# Altium PCB projet_pcb_etu_PIC18.PCBDOC
Units mm, origin at the board's own origin, x right, y up, seen from the top; angles counter-clockwise.
Board outline 141.22 x 100.51 mm, 2 copper layers (TopLayer, BottomLayer); 27 components, 44 nets, 123 pads, 0 vias.
Unrouted connection lines stored in the file: 59.
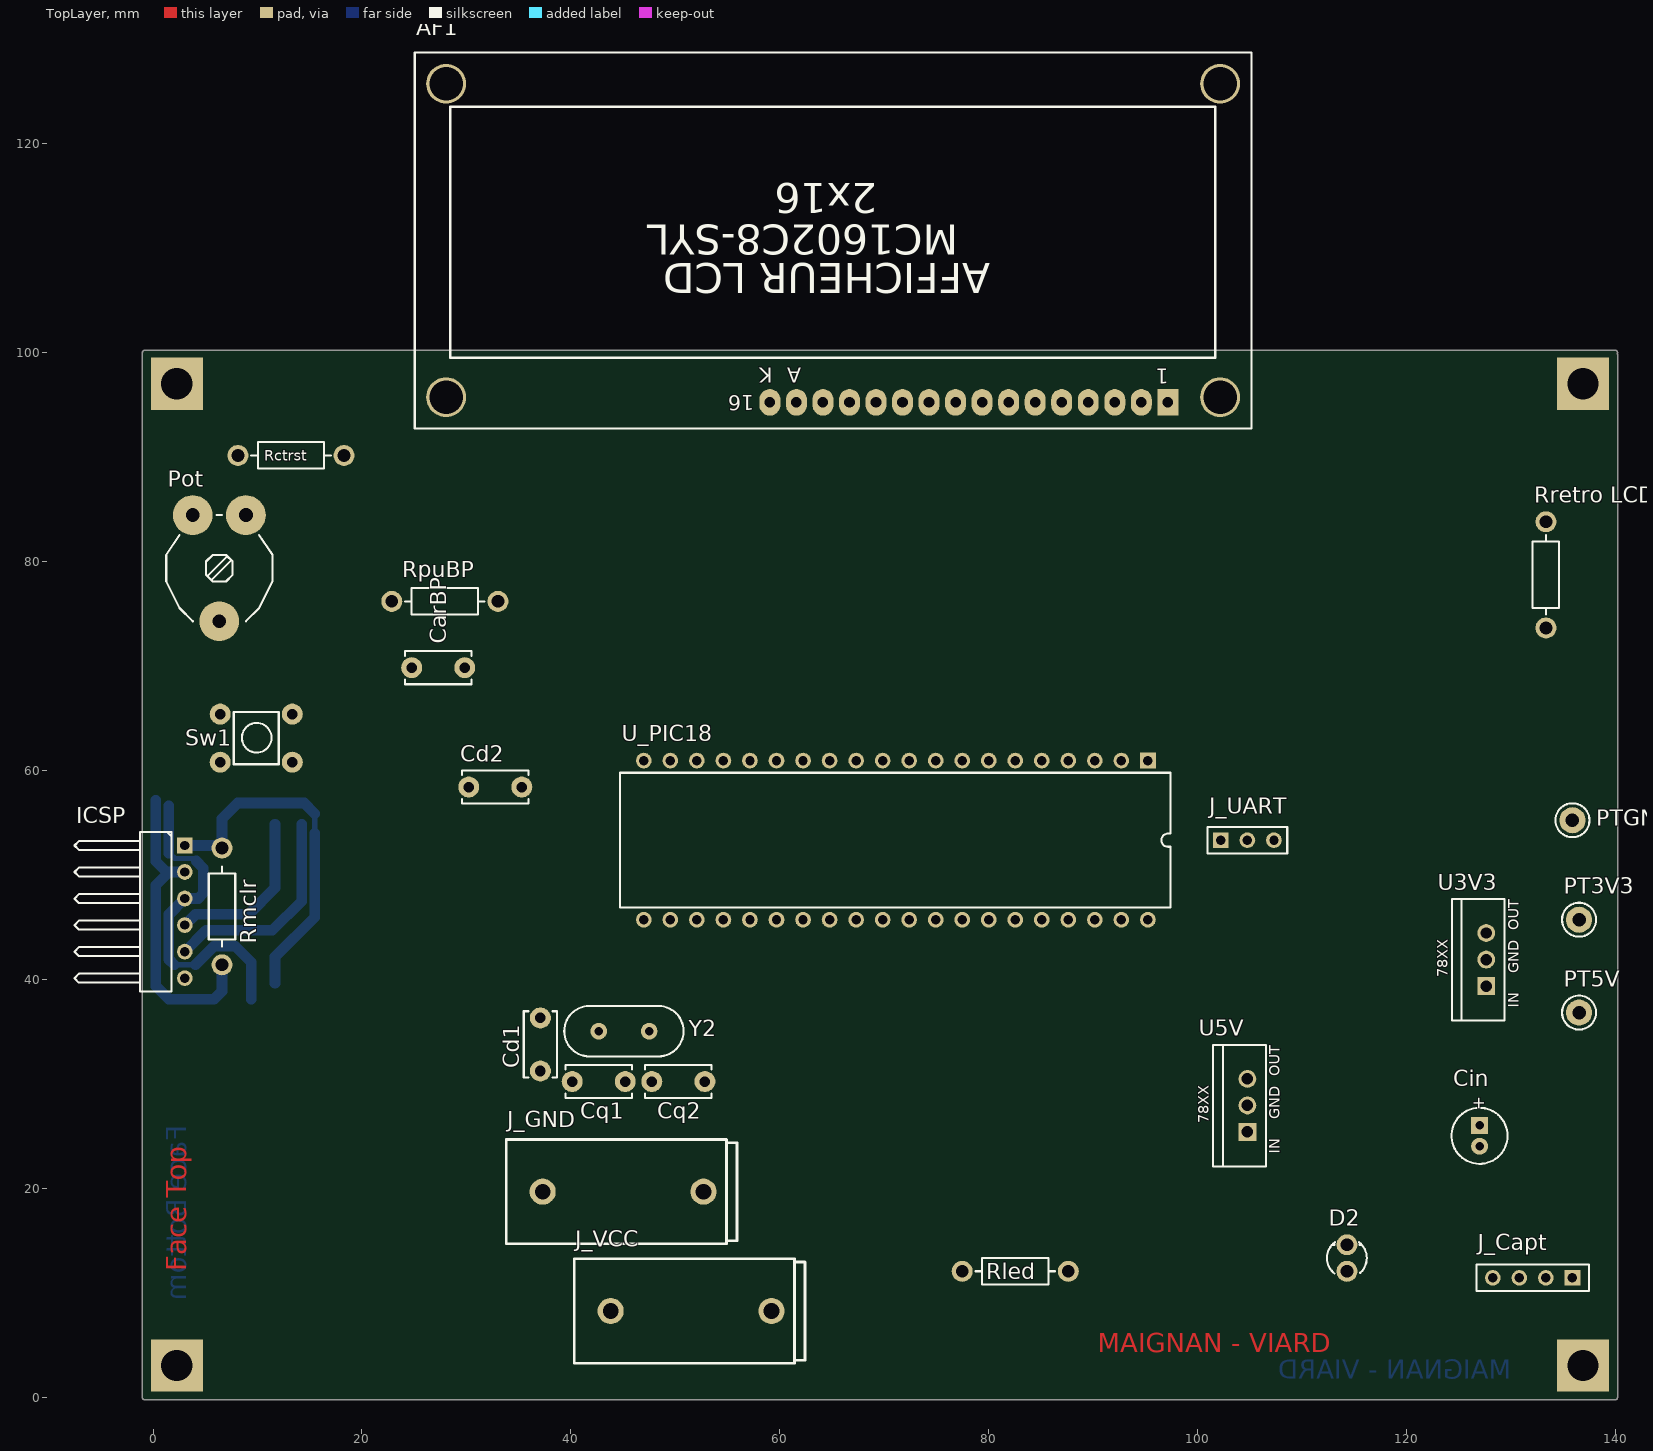
[diagram p0: TopLayer view]
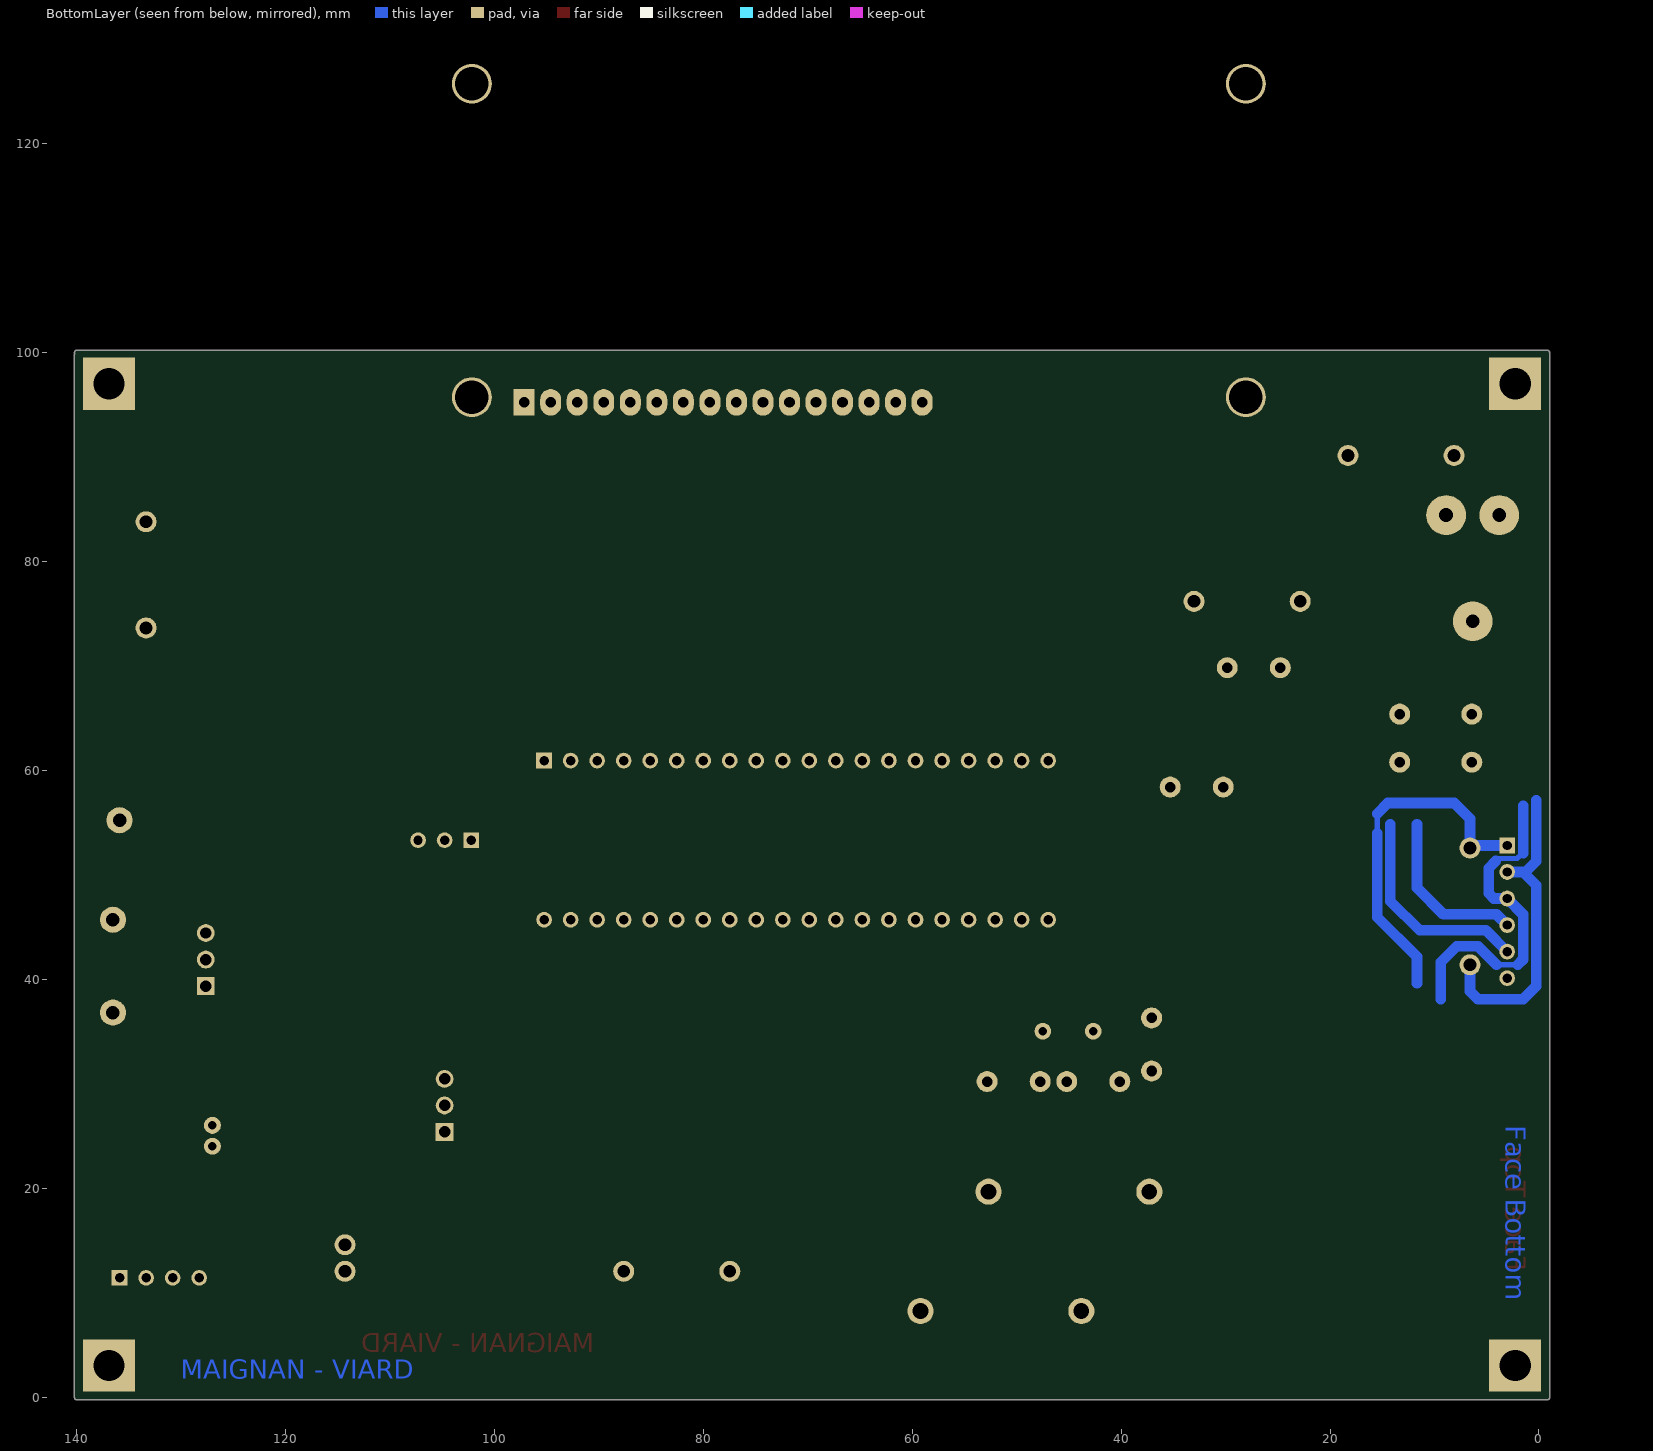
[diagram p1: BottomLayer view, seen from below]

## Layer stack, top to bottom
TopSolder: solder mask 0.0102, Solder Resist, Dk 3.5
TopLayer: signal copper 0.0356
Dielectric1: core 0.32, FR-4, Dk 4.8
BottomLayer: signal copper 0.0356
BottomSolder: solder mask 0.0102, Solder Resist, Dk 3.5

## Board outline
-0.762,-0.254 cw(c-0.762,0) -1.016,0 -1.016,100 cw(c-0.762,100) -0.762,100.254 139.954,100.254 cw(c139.954,100) 140.208,100 cw(c139.954,100) 140.192,99.911 cw(c139.954,99.822) 140.208,99.822 140.208,0 cw(c139.954,0) 139.954,-0.254

## Design rules (kind name [scope] priority, off if disabled: settings)
Clearance [All] p1: gap=0.25 ignorepadtopadclearanceinfootprint=FALSE except(0: Arc-Hole Track-Hole SMDPad-Hole THPad-Hole Via-Hole Fill-Hole Poly-Hole Region-Hole Text-Hole)
FabricationTestPointUsage TestPointUsage [All] p1: valid=0 allowmultiple=FALSE
FabricationTestpoint Testpoint [All] p1: side=3 testpointundercomponent=TRUE minsize=1.016 maxsize=2.54 preferedsize=1.524 minholesize=0.508 maxholesize=1.016 preferedholesize=0.813 testpointgrid=0.025 allowsidetop=TRUE allowsidebottom=TRUE usegrid=TRUE gridtolerance=0
PlaneConnect [All] p1: planeconnectstyle=Relief reliefexpansion=0.5 reliefentries=4 reliefconductorwidth=1.016 reliefairgap=0.5
PolygonConnect [All] p1: connectstyle=Relief reliefconductorwidth=1.016 reliefentries=4 polygonreliefangle="90 Angle" airgapwidth=0.254
RoomDefinition projet_pcb_etu_PIC18 [InComponentClass('projet_pcb_etu_PIC18')] p1: confinementstyle=ConfineIn formatcopy=TRUE lockcomponents=FALSE outline 141.605,1.905 179.705,1.905 179.705,16.51 141.605,16.51
RoutingVias [All] p1: holewidth=0.6 width=1.524 viastyle="Through Hole" minholewidth=0.6 minwidth=1.524 maxholewidth=0.6 maxwidth=1.524
ShortCircuit [All] p1: allowed=TRUE
SilkToSolderMaskClearance SilkscreenOverComponentPads [IsPad] p1: minsilkscreentomaskgap=0.254 clearancetoexposedcopper=TRUE
SolderMaskExpansion [All] p1: expansion=0.051 istentingtop=FALSE
Width Width_Power [(InNet('GND') OR InNet('+5V')  OR InNet('+3V3') OR InNet('VCC'))] p1: maxlimit=7.62 minlimit=0.406 preferedwidth=1.27
Width [All] p2: maxlimit=7.62 minlimit=0.279 preferedwidth=1.016
25 further rules are at their usual default settings.

## Components (designator, comment, footprint, x,y, rotation, side; value= is the part's Value field where it differs from the comment)
AF1 "AFFICHEUR_LCD_2X16_" AFFICHEUR_LCD_MC1602C8-SYL 97.155,95.25 r180 top
CarBP "CONDENSATEUR_CER_RAD_5.08" CONDENSATEUR_CERAMIQUE_RADIAL_5.08 29.845,69.85 r180 top value=100nF
Cd1 "CONDENSATEUR_CER_RAD_5.08" CONDENSATEUR_CERAMIQUE_RADIAL_5.08 37.084,31.242 r90 top value=10nF
Cd2 "CONDENSATEUR_CER_RAD_5.08" CONDENSATEUR_CERAMIQUE_RADIAL_5.08 35.306,58.42 r180 top value=10nF
Cin "CONDENSATEUR_POL_ELECTROLY_RAD_2.0/5.08" CONDENSATEUR_POLARISE_ELECTROLYTIQUE_RADIAL_2.0/5.08 127,25.035 r270 top value=10µF/>25V
Cq1 "CONDENSATEUR_CER_RAD_5.08" CONDENSATEUR_CERAMIQUE_RADIAL_5.08 45.212,30.226 r180 top value=22pF
Cq2 "CONDENSATEUR_CER_RAD_5.08" CONDENSATEUR_CERAMIQUE_RADIAL_5.08 47.752,30.226 r0 top value=22pF
D2 "LED_3MM" LED_3MM 114.3,14.605 r180 top
ICSP "BARRETTE_6 CONTACTS_1 RANGEE_MALE_COUDEE" BARRETTE_6_M_C 3.048,52.832 r270 top
J_Capt "BARRETTE_4 CONTACTS_1 RANGEE_FEMELLE_DROITE" BARRETTE_4_F_D 135.89,11.43 r180 top
J_GND "DOUILLE BANANE 4mm" DOUILLE_BANANE_4MM_COUDEE 52.705,19.685 r270 top
J_UART "BARRETTE 3 CONTACTS 1 RANGEE MALE DROITE" BARRETTE_3_M_D 102.235,53.34 r0 top
J_VCC "DOUILLE BANANE 4mm" DOUILLE_BANANE_4MM_COUDEE 59.215,8.255 r270 top
Pot "RESISTANCE_VARIABLE_TRAVERSANTE : PT10LV" TRIMMER_MONOTOUR_PT10LV 8.89,84.455 r180 top value=1K
PT3V3 "POINT_TEST" POINT_TEST 136.525,45.72 r0 top
PT5V "POINT_TEST" POINT_TEST 136.525,36.83 r270 top
PTGND "POINT_TEST" POINT_TEST 135.89,55.245 r270 top
Rctrst "RESISTANCE_AXIALE_1/4W" RESISTANCE_1/4W#1 18.288,90.17 r180 top value=10K
Rled "RESISTANCE_AXIALE_1/4W" RESISTANCE_1/4W#1 77.47,12.065 r0 top value=150
Rmclr "RESISTANCE_AXIALE_1/4W" RESISTANCE_1/4W#2 6.604,52.07 r270 top value=10K
RpuBP "RESISTANCE_AXIALE_1/4W" RESISTANCE_1/4W#1 33.02,76.2 r180 top value=10K
"Rretro LCD" "RESISTANCE_AXIALE_1/4W" RESISTANCE_1/4W#1 133.35,73.66 r90 top value=1K
Sw1 "BOUTON_POUSSOIR_MINIATURE_TRAVERSANT" BOUTON_POUSSE_PLAT_6x6 13.735,60.605 r90 top
U3V3 "REGULATEUR_TO220_78XX" REGULATEUR_TO220_78XX 127.635,41.91 r90 top
U5V "REGULATEUR_TO220_78XX" REGULATEUR_TO220_78XX 104.775,27.94 r90 top
U_PIC18 "PIC18F45K20-E/P_DIP40" DIP40_PAS=2.54_LARG=15.24_LONG=52.5 71.12,53.34 r180 top
Y2 "QUARTZ_DROIT_BAS_PROFIL" QUARTZ_DROIT_BP 42.672,35.052 r0 top value=20MHz

## Footprints (in the part's own frame and the unit in brackets; to place one, negate y for a bottom-side part, rotate by r counter-clockwise, add the part's x,y. Pads: shape width x height; smd on the part's side, far side on the other; paste and mask are expansions set on the pad)
AFFICHEUR_LCD_MC1602C8-SYL [mil] "AFFICHEUR LCD 2x16 - 80mm x 35mm"
  rect 79x100 hole 40: 1(0,0)
  oval 79x100 hole 40: 2(100,0) 3(200,0) 4(300,0) 5(400,0) 6(500,0) 7(600,0) 8(700,0) 9(800,0) 10(900,0) 11(1000,0) 12(1100,0) 13(1200,0) 14(1300,0) 15(1400,0) 16(1500,0)
  round 150 hole 126: FIX1(-196.85,-19.68) FIX2(2720.47,-19.68) FIX3(2720.47,-1200.79) FIX4(-196.85,-1200.79)
  silkscreen extent -315,-1319 2839,98, body extent -327,-1354 2843,83, height 847
BARRETTE_3_M_D [mm] "BARRETTE 3 CONTACTS ; 1 RANGEE ; DROITE ; MALE ; ESPACEMENT BROCHES = 2.54 mm"
  rect 1.5x1.5 hole 0.9: 1(0,0)
  round 1.5 hole 0.9: 2(2.54,0) 3(5.08,0)
  silkscreen extent -1.27,-1.27 6.35,1.27, body extent -1.21,-1.42 6.41,1.5, height 8.61
BARRETTE_4_F_D [mm] "BARRETTE 4 CONTACTS ; 1 RANGEE ; DROITE ; FEMELLE ; ESPACEMENT BROCHES = 2.54 mm"
  rect 1.5x1.5 hole 0.9: 1(0,0)
  round 1.5 hole 0.9: 2(2.54,0) 3(5.08,0) 4(7.62,0)
  silkscreen extent -1.6,-1.27 9.2,1.27, body extent -1.53,-1.21 9.13,1.2, height 8.5
BARRETTE_6_M_C [mm] "BARRETTE 6 CONTACTS ; 1 RANGEE ; COUDEE ; MALE ; ESPACEMENT BROCHES = 2.54 mm"
  rect 1.5x1.5 hole 0.9: 1(0,0)
  round 1.5 hole 0.9: 2(2.54,0) 3(5.08,0) 4(7.62,0) 5(10.16,0) 6(12.7,0)
  silkscreen extent -1.27,-10.57 13.97,-1.27, body extent -1.27,-10.14 13.97,0.34, height 3.18
BOUTON_POUSSE_PLAT_6x6 [mil] "BOUTON POUSSOIR MINIATURE ON/OFF; BOUTON PLAT/LONG ; ESPACEMENT BROCHES = 7.62mm/5.08mm"
  round 79 hole 40: 1(7.87,15.75) 2(188.98,15.75) 3(188.98,287.4) 4(7.87,287.4)
  silkscreen extent 0,67 197,236, body extent -22,-1 222,310, height 276
CONDENSATEUR_CERAMIQUE_RADIAL_5.08 [mil] "CONDENSATEUR TRAVERSANT CERAMIQUE RADIAL ; DIMENSIONS : 3.17mm x 5.08mm"
  round 79 hole 40: 1(0,0) 2(200,0)
  silkscreen extent -25,-62 225,63, body extent -11,-43 209,42, height 148
CONDENSATEUR_POLARISE_ELECTROLYTIQUE_RADIAL_2.0/5.08 [mil] "CONDENSATEUR POLARISE ELECTROLYTIQUE RADIAL ; DIAMETRE : 5.08mm ; ESPACEMENT BROCHES : 2mm"
  rect 64x64 / inner round 64 / far side round 64 hole 32: 1(-39.37,0)
  round 64 hole 32: 2(39.37,0)
  silkscreen extent -106,-105 106,106, body extent -98,-98 98,98, height 433
DIP40_PAS=2.54_LARG=15.24_LONG=52.5 [mm] "Dual-In-Line Plastic Packages (PDIP) ; 40 Leads ; Row Spacing = 15.24 mm ; Pitch = 2.54 mm"
  rect 1.5x1.5 hole 0.9: 1(-24.13,-7.62)
  round 1.5 hole 0.9: 2(-21.59,-7.62) 3(-19.05,-7.62) 4(-16.51,-7.62) 5(-13.97,-7.62) 6(-11.43,-7.62) 7(-8.89,-7.62) 8(-6.35,-7.62) 9(-3.81,-7.62) 10(-1.27,-7.62) 11(1.27,-7.62) 12(3.81,-7.62) 13(6.35,-7.62) 14(8.89,-7.62) 15(11.43,-7.62) 16(13.97,-7.62) 17(16.51,-7.62) 18(19.05,-7.62) 19(21.59,-7.62) 20(24.13,-7.62) 21(24.13,7.62) 22(21.59,7.62) 23(19.05,7.62) 24(16.51,7.62) 25(13.97,7.62) 26(11.43,7.62) 27(8.89,7.62) 28(6.35,7.62) 29(3.81,7.62) 30(1.27,7.62) 31(-1.27,7.62) 32(-3.81,7.62) 33(-6.35,7.62) 34(-8.89,7.62) 35(-11.43,7.62) 36(-13.97,7.62) 37(-16.51,7.62) 38(-19.05,7.62) 39(-21.59,7.62) 40(-24.13,7.62)
  silkscreen extent -26.3,-6.45 26.4,6.45, body extent -26.2,-7.8 26.25,7.69, height 5.7
DOUILLE_BANANE_4MM_COUDEE [mm]
  round 2.5 hole 1.5: 1(0,0) 2(0,-15.4)
  silkscreen extent -5,-18.9 5,3.2
LED_3MM [mil] "LED 3MM ; ESPACEMENT BROCHES : 2.54mm"
  round 79 hole 48: 1(0,100) 2(0,0)
  silkscreen extent -75,-10 75,109, body extent -65,-16 65,114, height 217
POINT_TEST [mm] "PASTILLE TRAVERSANTE ; DIAMETRE = 2.5 mm ; DIAMETRE PERCAGE = 1.3 mm"
  round 2.5 hole 1.3: 1(0,0)
  silkscreen extent -1.63,-1.62 1.63,1.62, body extent -1.24,-1.27 1.3,1.27, height 5.94
QUARTZ_DROIT_BP [mil] "QUARTZ DROIT BAS PROFIL ; DIMENSIONS : 11.43mm x 4.82mm ; ESPACEMENT BROCHES : 4.82mm"
  round 63 hole 32: 1(0,0) 2(190,0)
  silkscreen extent -130,-95 320,95, body extent -129,-93 318,91, height 138
REGULATEUR_TO220_78XX [mm] "BOITIER TO220 ; DIMENSIONS : 11.2mm x 4.7mm ; ESPACEMENT BROCHES : 2.54 mm"
  rect 1.7x1.7 hole 1.1: 1(-2.54,0)
  round 1.7 hole 1.1: 2(0,0) 3(2.54,0)
  silkscreen extent -5.83,-1.77 5.8,3.29, body extent -5.61,-1.59 5.61,3.1, height 19.33
RESISTANCE_1/4W#1 [mil] "RESISTANCE 0.25W; DIAMETRE : 2.54mm ; LONGUEUR : 6.35mm ; PAS : 10.16mm"
  round 79 hole 48: 1(0,0) 2(400,0)
  silkscreen extent 50,-50 350,50, body extent -15,-47 409,44, height 116
RESISTANCE_1/4W#2 [mil] "RESISTANCE 0.25W; DIAMETRE : 2.54mm ; LONGUEUR : 6.35mm ; PAS : 10.16mm"
  round 79 hole 48: 1(-20,0) 2(420,0)
  silkscreen extent 50,-50 350,50, body extent -15,-47 409,44, height 116
TRIMMER_MONOTOUR_PT10LV [mil] "RESISTANCE VARIABLE MONOTOUR  PT10LV; DIMENSIONS : 10.16mm x 5.08mm"
  round 150 hole 52: 1(0,0) 2(100,400) 3(200,0)
  silkscreen extent -100,0 300,400, body extent -102,-9 303,408, height 246

## Part data
AF1: library part AFFICHEUR_LCD_MC1602C8-SYL, "AFFICHEUR LCD - 2x16 LIGNES - 5X7 DOTS - STN - 80mm x 36mm", Name=MC1602C8-SYL, Type=LCD2X16_STN
CarBP Cd1 Cd2 Cq1 Cq2: "CONDENSATEUR TRAVERSANT CERAMIQUE RADIAL 5.08mm", Type=RADIAL_5.08
Cin: "CONDENSATEUR POLARISE ELECTROLYTIQUE RADIAL 2.0/5.08", Type=POL_RAD_2.0/5.08
D2: "LED 3MM - ROUGE/VERTE/JAUNE", Type=LED_3mm
ICSP: "BARRETTE 6 CONTACTS 1 RANGEE MALE COUDEE", Type=M_C_6
J_Capt: "BARRETTE 4 CONTACTS 1 RANGEE FEMELLE DROITE", Type=F_D_4
J_GND J_VCC: library part DOUILLE_BANANE_4mm, "DOUILLE BANANE 4 mm", Type=BANANE_4mm
J_UART: library part "BARRETTE_3 CONTACTS_1 RANGEE_MALE_DROITE", Type=M_D_3
Pot: "RESISTANCE VARIABLE_TRAVERSANTE : PT10LV", Type=PT10LV
PT3V3 PT5V PTGND: "POINT TEST"
Rctrst Rled Rmclr RpuBP "Rretro LCD": "RESISTANCE TRAVERSANTE AXIALE 1/4W", Type=1/4W
Sw1: "BOUTON POUSSOIR MINIATURE TRAVERSANT ON/OFF", Type=B_POUSS_MINI_T
U3V3 U5V: "REGULATEUR DE TENSION POSITIVE 78XX BOITIER TO220", Package=TO220
  U3V3: Type=LF33CV
  U5V: Type=7805
U_PIC18: "MICROCONTROLEUR 8 BITS - 36I/O - 32KO : FLASH - 16KMOTS : MEMOIRE PROG - 4 TIMERS - 256 OCTETS : EEPROM -", Package=DIP40, Type=PIC1845K20-E/P
Y2: "QUARTZ DROIT BAS PROFIL", Type=DROIT_BP

## Free pads (board coordinates)
  rect 5x5 hole 3: 1(2.286,97.028) 2(2.286,3.048) 3(136.906,3.048) 4(136.906,97.028)

## Nets (pads, with @x,y where several pads share a name; then routed paths per layer and width w, separated by ;. In a path a pad name is that pad's centre, name@x,y a point inside that pad or via, vN(x,y) a via of type N, cw(c..) or ccw(c..) an arc to the next point about the centre after c; other vN are vias at no path point)
5V_p: 
+3V3: Cd1.2 Cd2.2 ICSP.2 PT3V3.1 Rmclr.2 RpuBP.1 U3V3.3 U_PIC18.11 U_PIC18.32 | length 30
  BottomLayer w1.016: 0.254,57.15 0.254,51.308 1.397,50.165 0.254,49.022 0.254,39.37 1.524,38.1 5.842,38.1 6.604,38.862 Rmclr.2 ; 1.524,50.292 ICSP.2
+5V: "Rretro LCD.1" AF1.2 J_Capt.1 PT5V.1 Rctrst.1 U3V3.1 U5V.3
AN0: U_PIC18.2
EXEMPLE_IN: J_Capt.2
EXEMPLE_OUT: J_Capt.3
GND: AF1.1 AF1.16 CarBP.1 Cd1.1 Cd2.1 Cin.2 Cq1.2 Cq2.2 D2.2 ICSP.3 J_Capt.4 J_GND.1 J_UART.1 Pot.3 PTGND.1 Sw1.1 U3V3.2 U5V.2 U_PIC18.12 U_PIC18.31 | length 32.3
  BottomLayer w0.508: 1.524,52.07 1.597,52.07 2.089,51.578 3.895,51.578 4.13,51.342 ; 2.032,41.402 4.064,41.402
  BottomLayer w1.016: 1.524,52.07 1.524,56.642 ; 2.032,41.402 1.524,41.91 1.524,46.228 ICSP.3 4.318,47.752 4.826,48.26 4.826,50.546 4.826,50.647 4.13,51.342 ; 4.064,41.402 5.842,43.18 7.874,43.18 9.398,41.656 9.398,38.1
GRILLEMOS1: U_PIC18.8
GRILLEMOS2: U_PIC18.9
GRILLEMOS3: U_PIC18.10
INT0: U_PIC18.33
KYBD_IN0: U_PIC18.4
KYBD_IN1: U_PIC18.5
KYBD_IN2: U_PIC18.6
KYBD_IN3: U_PIC18.7
KYBD_OUT0: U_PIC18.19
KYBD_OUT1: U_PIC18.20
KYBD_OUT2: U_PIC18.21
KYBD_OUT3: U_PIC18.22
LCD_DATA0: AF1.11 U_PIC18.30
LCD_DATA1: AF1.12 U_PIC18.29
LCD_DATA2: AF1.13 U_PIC18.28
LCD_DATA3: AF1.14 U_PIC18.27
LCD_E: AF1.6 U_PIC18.23 U_PIC18.36
LCD_RS: AF1.4 U_PIC18.38
LCD_RW: AF1.5 U_PIC18.37
LED: Rled.1 U_PIC18.15
MCLR: ICSP.1 Rmclr.1 U_PIC18.1 | length 34.2
  BottomLayer w0.508: Rmclr.1@6.35,52.832 Rmclr.1 ; 15.494,54.001 15.494,55.88
  BottomLayer w1.016: ICSP.1 Rmclr.1@6.35,52.832 ; Rmclr.1 6.604,55.372 8.128,56.896 14.478,56.896 15.494,55.88 ; 11.684,39.624 11.684,42.164 15.494,45.974 15.494,54.001
NetAF1_15: "Rretro LCD.2" AF1.15
NetCq1_1: Cq1.1 U_PIC18.13 Y2.1
NetCq2_1: Cq2.1 U_PIC18.14 Y2.2
NetD2_1: D2.1 Rled.2
NetPot_1: Pot.1 Rctrst.2
PGC: ICSP.5 U_PIC18.39 | length 20.5
  BottomLayer w1.016: ICSP.5 5.08,44.704 11.43,44.704 14.224,47.498 14.224,54.864
PGD: ICSP.4 U_PIC18.40 | length 16.2
  BottomLayer w1.016: ICSP.4 4.064,46.228 9.144,46.228 11.684,48.768 11.684,54.864
RX: J_UART.2 U_PIC18.26
SCL: U_PIC18.18
serv1: U_PIC18.16
serv2: U_PIC18.17
serv4: CarBP.2 RpuBP.2 Sw1.2 U_PIC18.34
serv5: U_PIC18.24
TX: J_UART.3 U_PIC18.25
VCC: Cin.1 J_VCC.1 U5V.1
VCONTRAST: AF1.3 Pot.2
pads on no net: AF1.7 AF1.8 AF1.9 AF1.10 AF1.FIX1 AF1.FIX2 AF1.FIX3 AF1.FIX4 ICSP.6 J_GND.2 J_VCC.2 Sw1.3 Sw1.4 U_PIC18.3 U_PIC18.35

## Other copper
TopLayer:
  text "Face Top" at 3.175,12.065 h1.91 r90
  text "MAIGNAN - VIARD" at 90.424,4.318 h1.8
BottomLayer:
  text "Face Bottom" at 3.175,26.035 h1.91 r90
  text "MAIGNAN - VIARD" at 130.048,1.778 h1.8

## Silkscreen, mask and mechanical layers (free items; w line width, h text height)
Mechanical15:
  lines w0.508: -0.762,0 139.954,0 139.954,100 -0.762,100 -0.762,0

## Text inside footprints (layer, text, board x,y; h text height)
AF1: TopOverlay "MC1602C8-SYL" at 77.089,112.268 h2.86 r180; TopOverlay "AFFICHEUR LCD" at 80.155,108.55 h2.86 r180; TopOverlay "1" at 97.255,98.45 h1.43 r180; TopOverlay "16" at 57.555,95.95 h1.43 r180; TopOverlay "A" at 62.055,98.55 h1.43 r180; TopOverlay "K" at 59.355,98.55 h1.43 r180; TopOverlay "2x16" at 69.355,116.25 h2.86 r180
Cin: TopOverlay "+" at 126.45,28.815 h1.14 r270
U3V3: TopOverlay "IN" at 130.735,37.31 h1 r90; TopOverlay "GND" at 130.735,40.61 h1 r90; TopOverlay "OUT" at 130.735,44.71 h1 r90; TopOverlay "78XX" at 123.935,40.21 h1 r90
U5V: TopOverlay "IN" at 107.875,23.34 h1 r90; TopOverlay "GND" at 107.875,26.64 h1 r90; TopOverlay "OUT" at 107.875,30.74 h1 r90; TopOverlay "78XX" at 101.075,26.24 h1 r90